# Altium PCB largeCollar_AA.PcbDoc
Units mil, origin at the board's own origin, x right, y up, seen from the top; angles counter-clockwise.
Board outline 2200 x 1299.21 mil, 4 copper layers (Top Layer, Ground, Power, Bottom Layer), stack 58.706 mil thick; 92 components, 50 nets, 292 pads, 105 vias.
Unrouted connection lines stored in the file: 132.
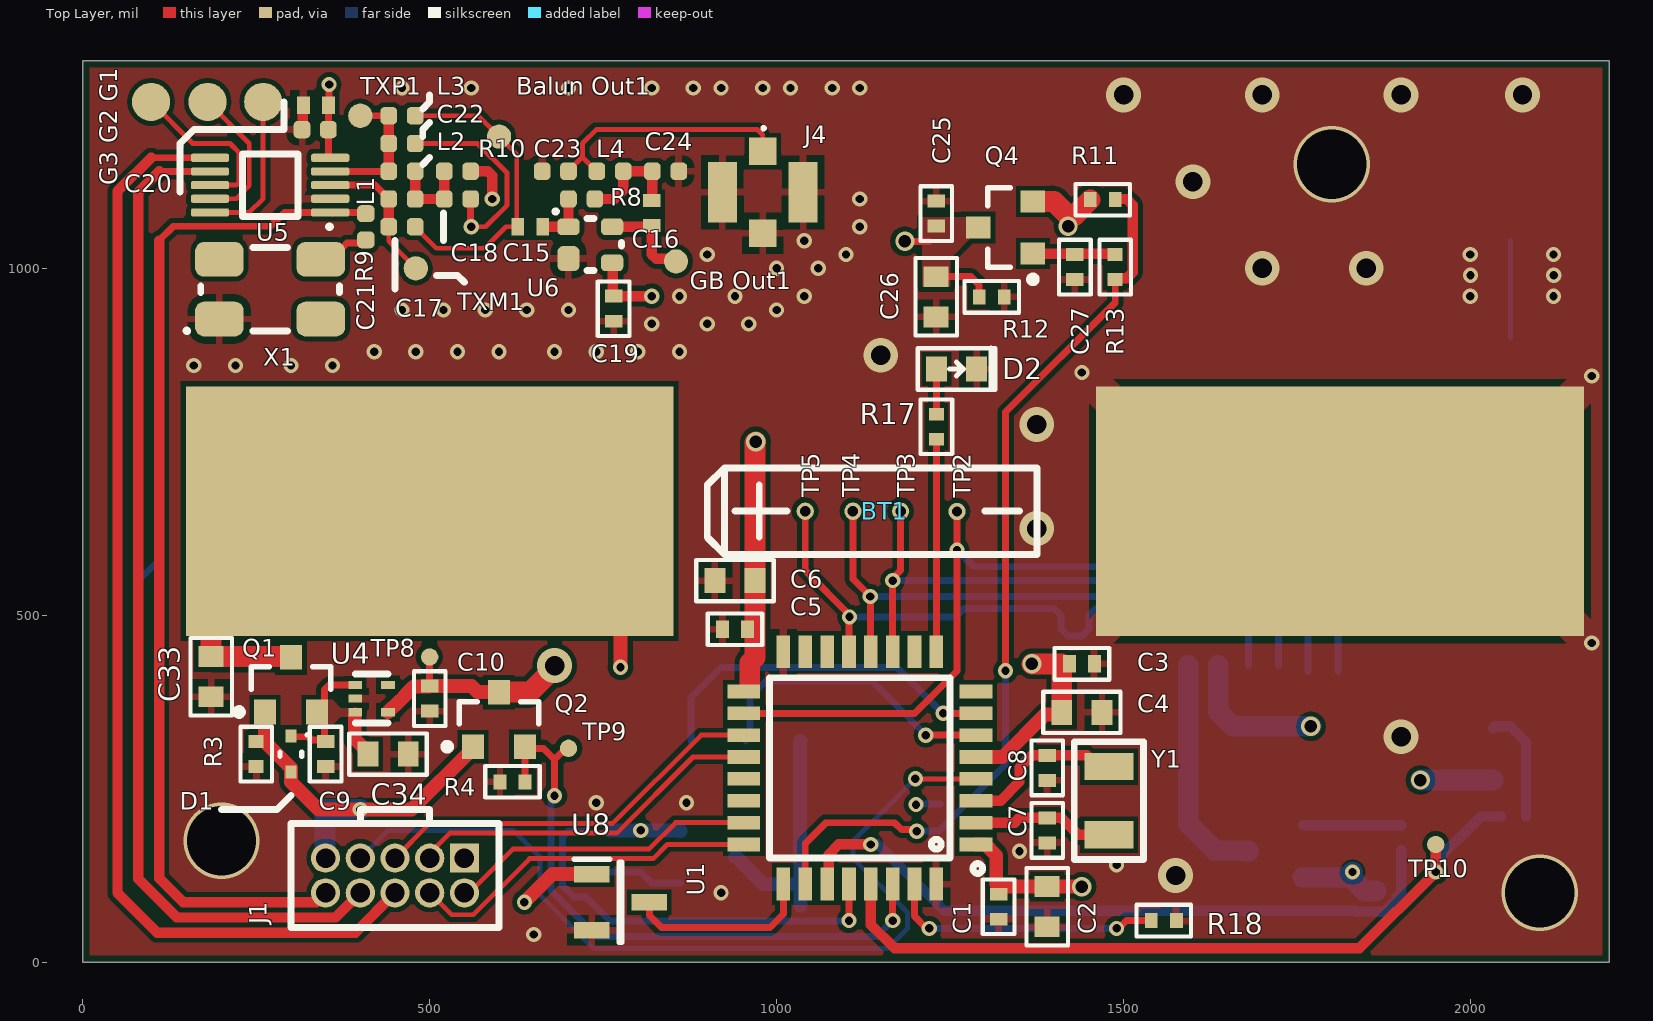
[diagram p0: Top Layer view]
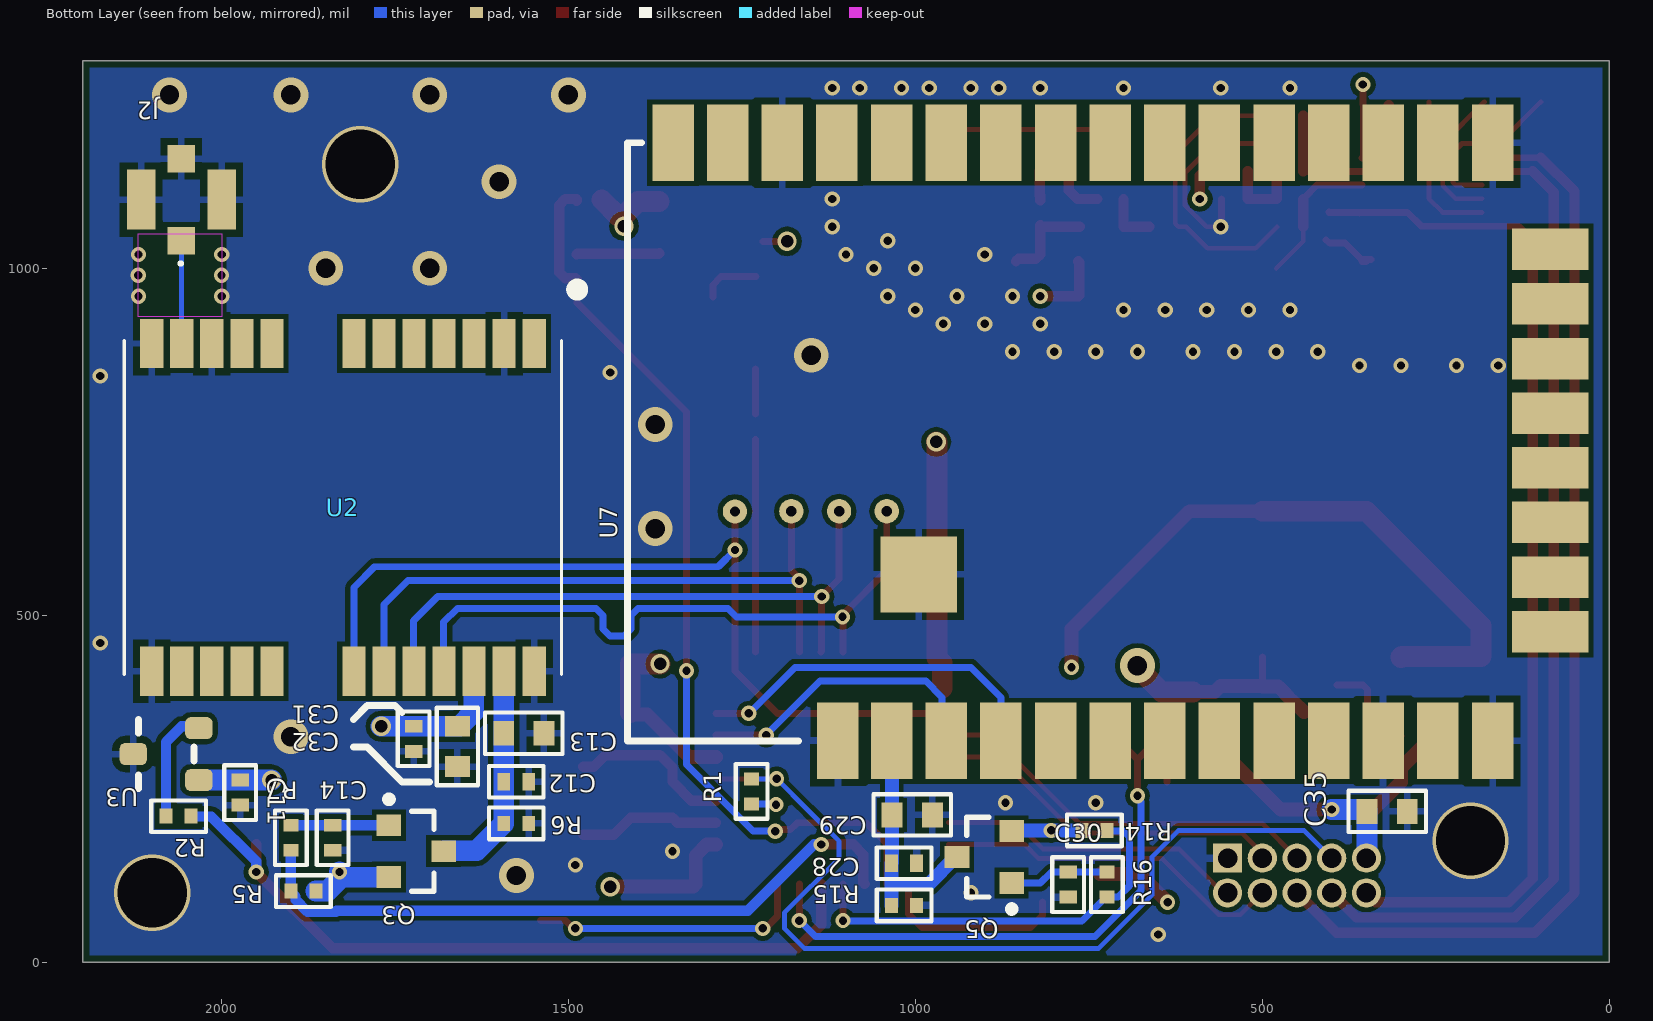
[diagram p1: Bottom Layer view, seen from below]
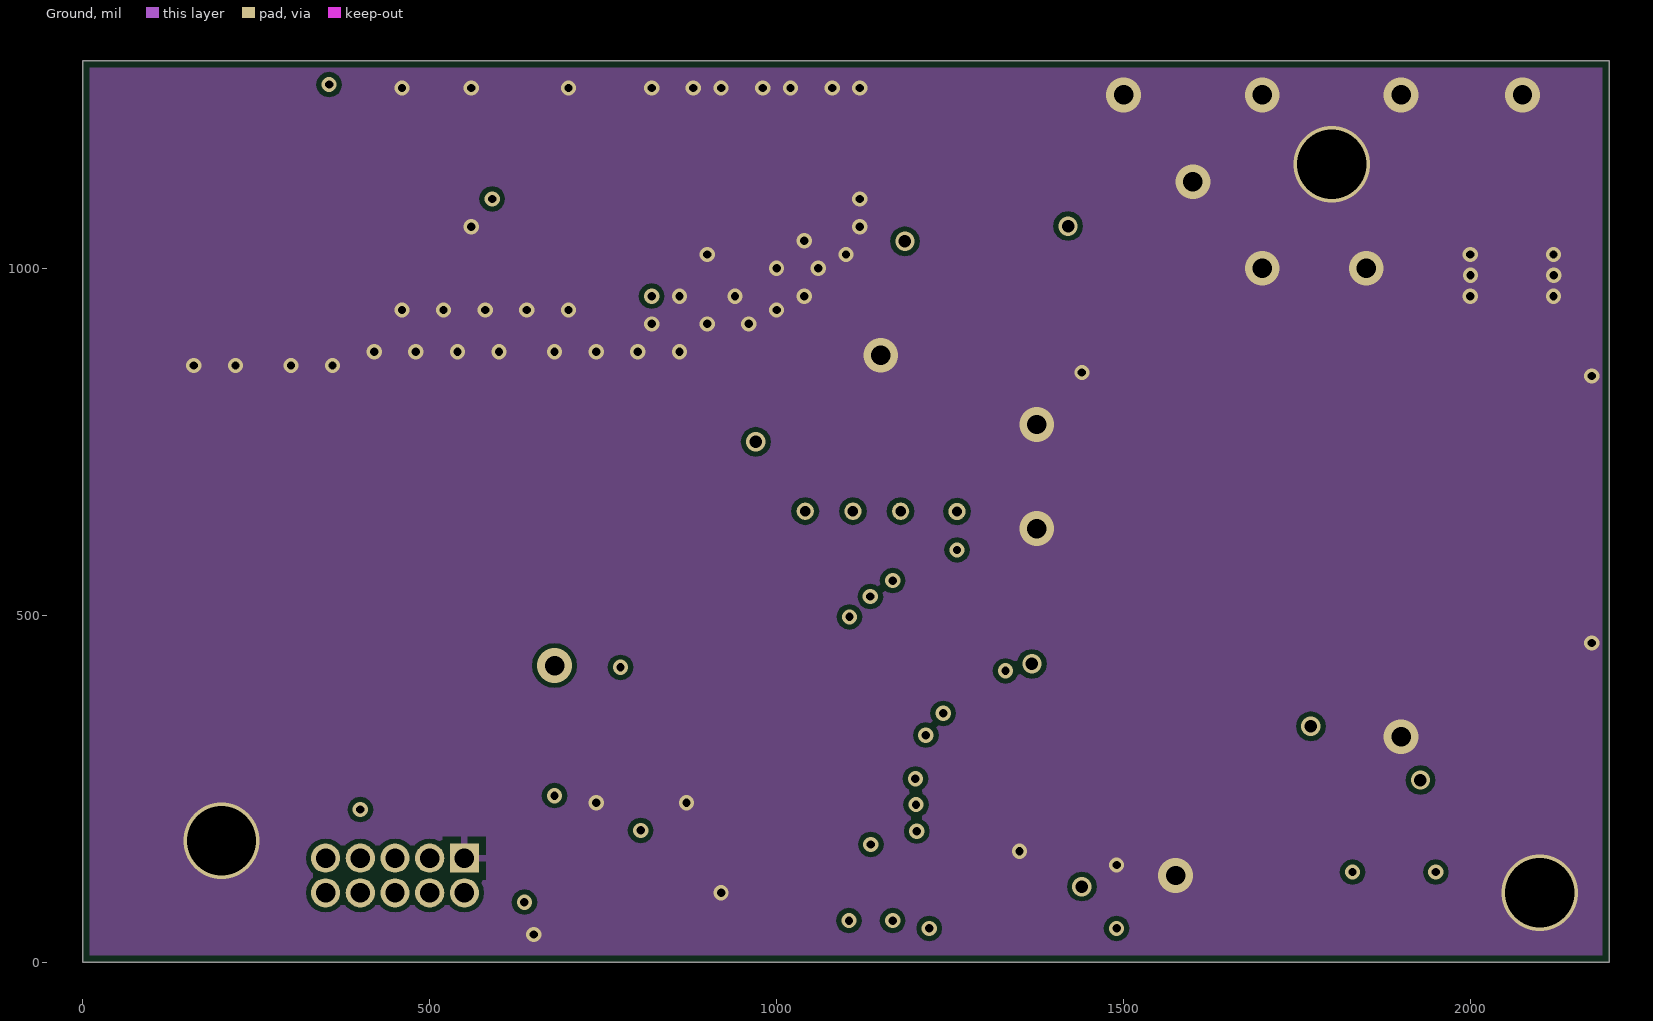
[diagram p2: Ground]
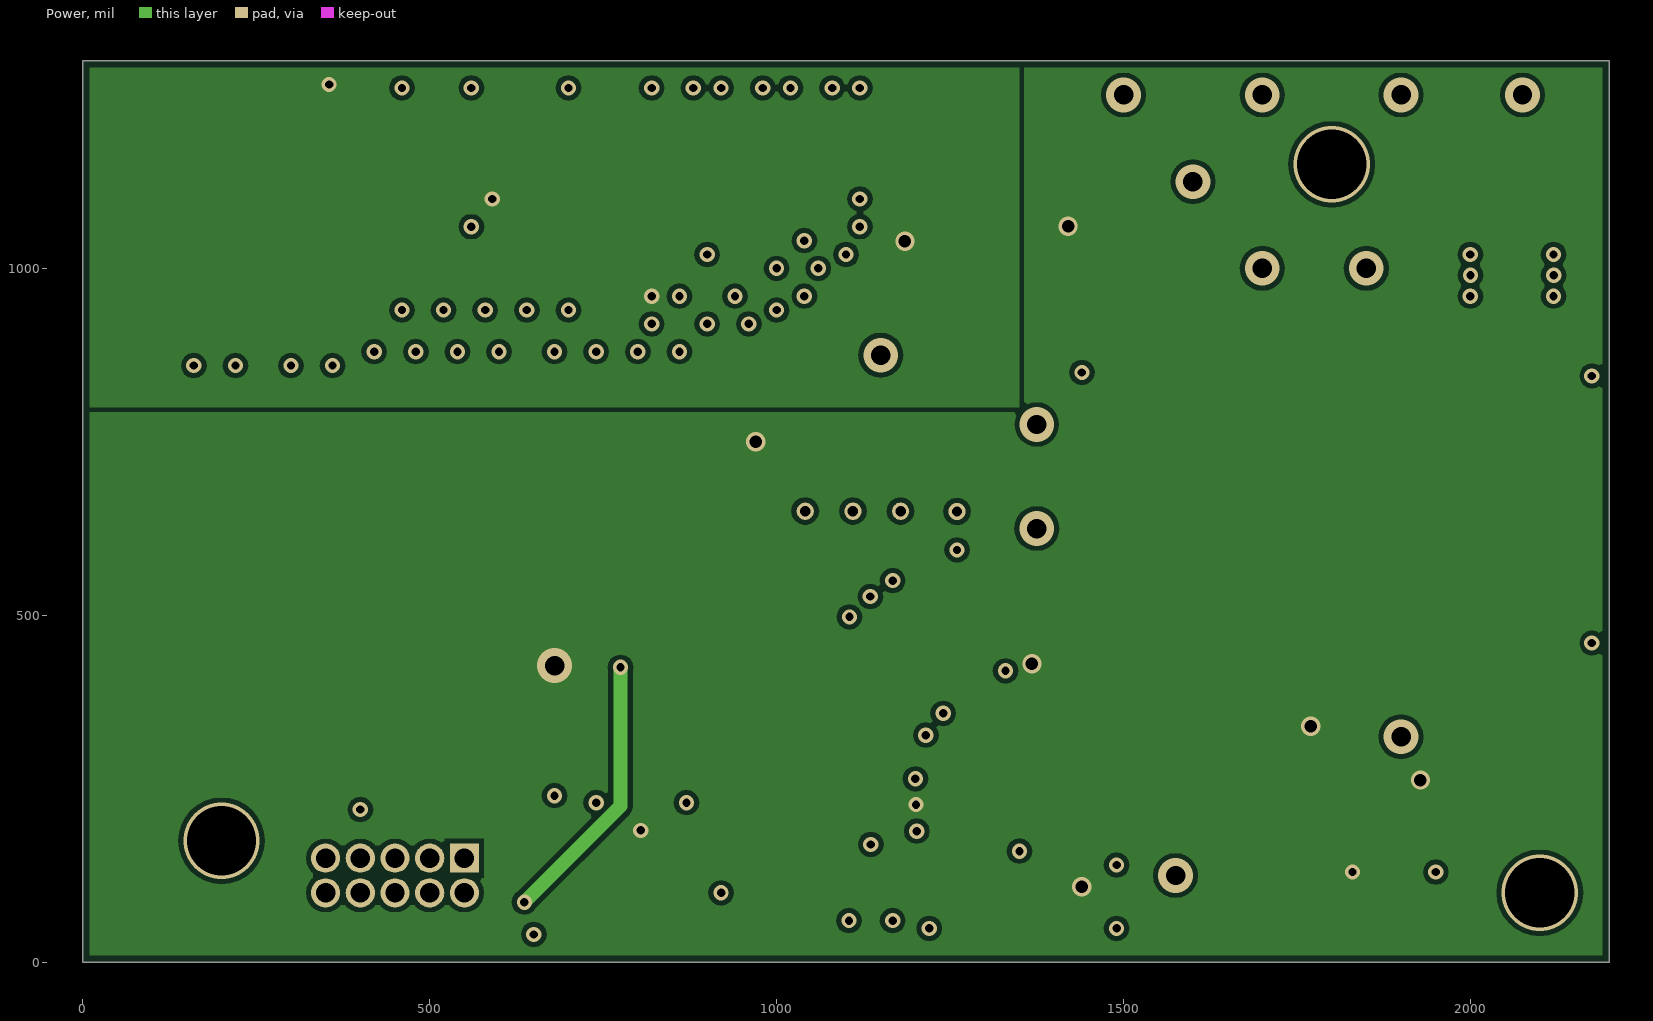
[diagram p3: Power]
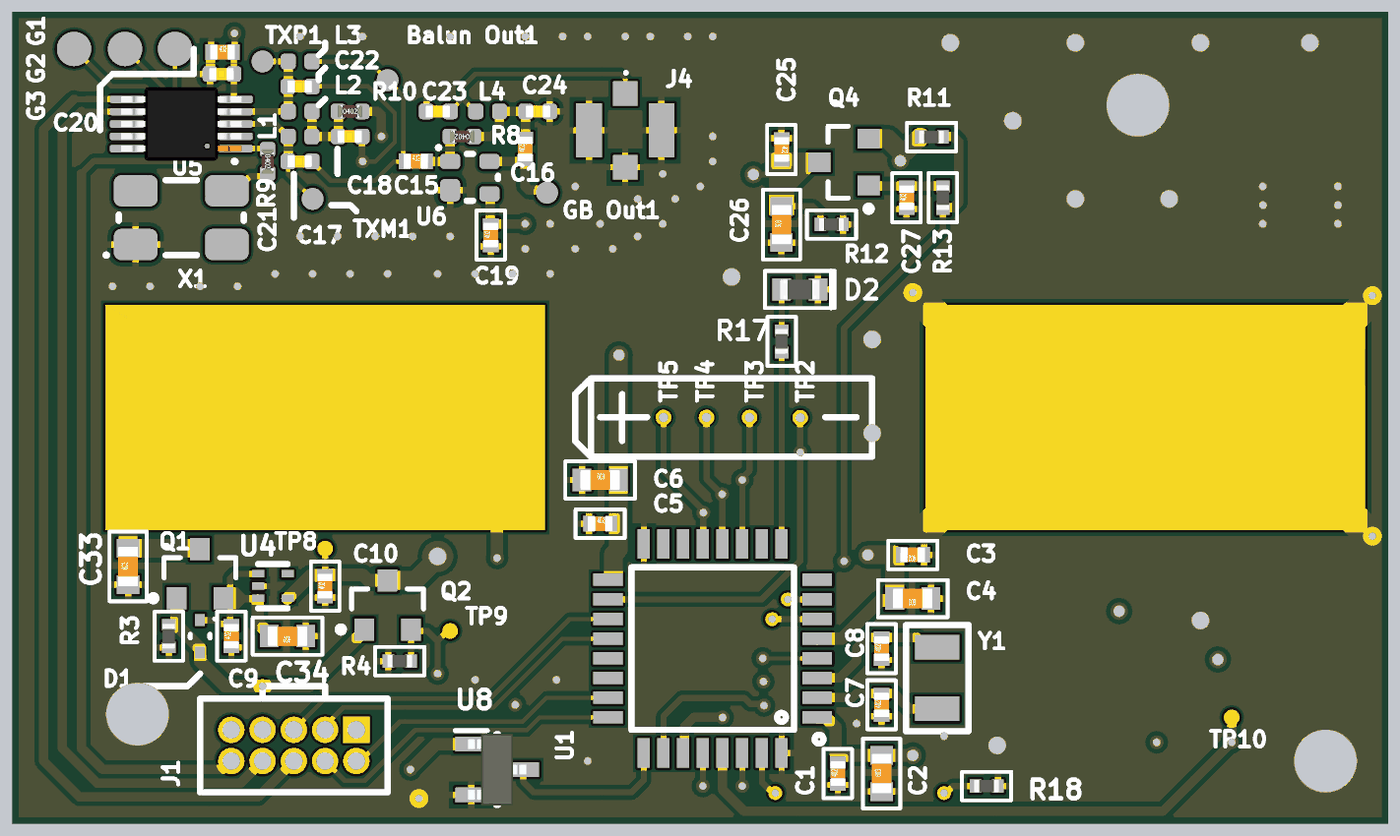
[diagram p4: 3D render of the assembled board from above, using the file's embedded part models]
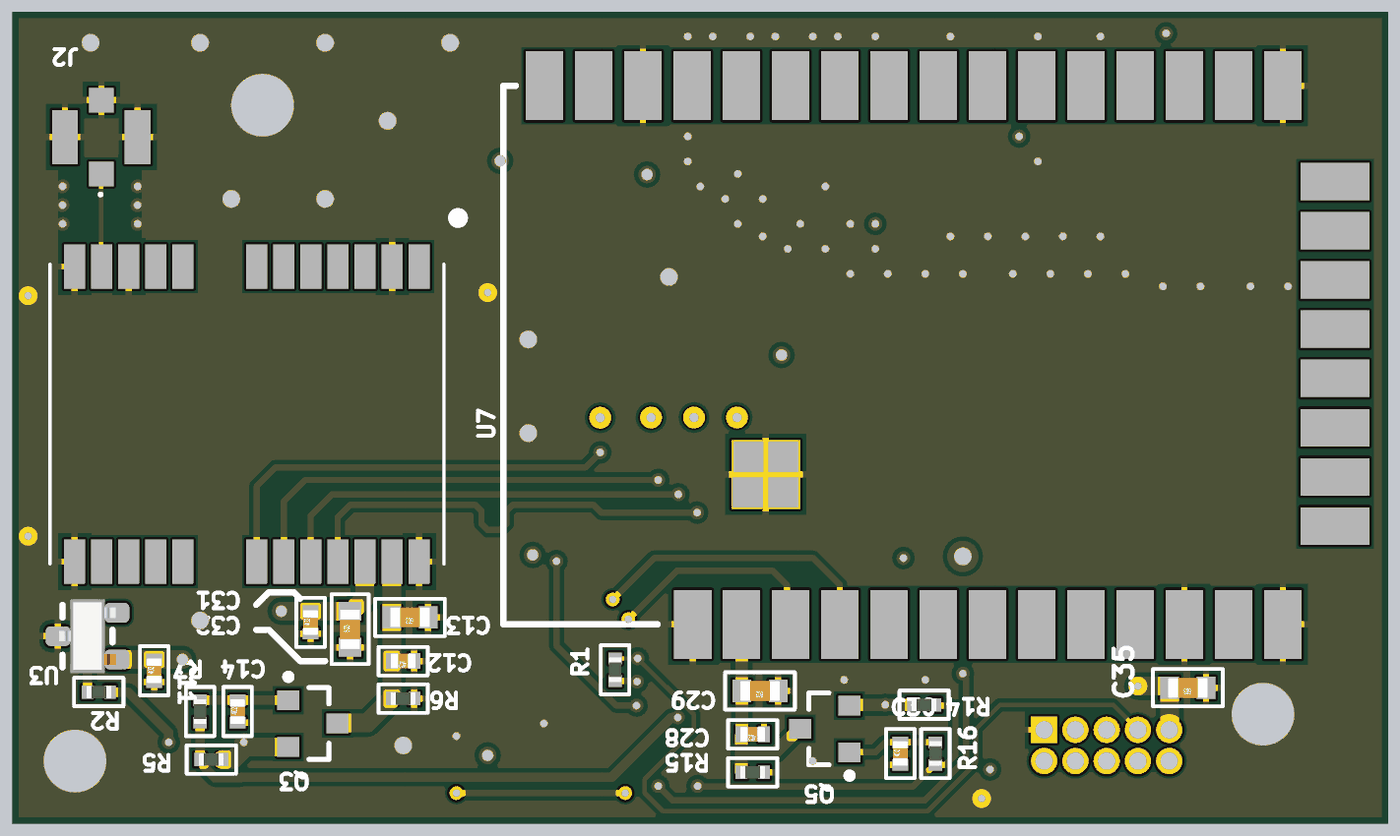
[diagram p5: 3D render of the assembled board from below, using the file's embedded part models]

## Layer stack, top to bottom
Top Solder: solder mask 0.4, Solder Resist, Dk 3.5
Top Layer: signal copper 1.4
Dielectric 2: prepreg 4.33, PP-006, Dk 4.29
Ground: signal copper 1.3778
Dielectric 1: dielectric 44.49, FR-4, Dk 3.96
Power: signal copper 1.3778
Dielectric 3: prepreg 4.33, PP-006, Dk 4.29
Bottom Layer: signal copper 1.4
Bottom Solder: solder mask 0.4, Solder Resist, Dk 3.5

## Board outline
0,0 2200,0 2200,1299.21 0,1299.21

## Design rules (kind name [scope] priority, off if disabled: settings)
BoardOutlineClearance [All] p1: gap=10 ignorepadtopadclearanceinfootprint=FALSE
Clearance [All] p1: gap=7 ignorepadtopadclearanceinfootprint=FALSE
ComponentClearance isBattery [InComponent('BT1')] p1: gap=0 collisioncheckmode=3 verticalgap=0 showdistances=FALSE
ComponentClearance isTestPoint [InComponent('TP*')] p2: gap=0 collisioncheckmode=3 verticalgap=0 showdistances=FALSE
ComponentClearance [All] p3: gap=10 collisioncheckmode=3 verticalgap=10 showdistances=FALSE
HoleSize [All] p1: absolutevalues=TRUE maxlimit=6000 minlimit=12 maxpercent=80.000 minpercent=20.000
MinimumSolderMaskSliver [All] p1: minsoldermaskwidth=0
PolygonConnect [HasFootprint('KEYSTONE_99')] p1: connectstyle=Relief reliefconductorwidth=50 reliefentries=4 polygonreliefangle="45 Angle" airgapwidth=10
PolygonConnect IsGround [InNet('GND')] p2: thpad.connectstyle=Relief thpad.reliefconductorwidth=10 thpad.reliefentries=4 thpad.polygonreliefangle="90 Angle" thpad.airgapwidth=10 smdpad.connectstyle=Relief smdpad.reliefconductorwidth=10 smdpad.reliefentries=4 smdpad.polygonreliefangle="90 Angle" smdpad.airgapwidth=10 via.connectstyle=Direct via.reliefconductorwidth=10 via.reliefentries=4 via.polygonreliefangle="90 Angle" via.airgapwidth=10
PolygonConnect IsntGround [All] p3: connectstyle=Direct reliefconductorwidth=10 reliefentries=4 polygonreliefangle="90 Angle" airgapwidth=10
RoutingVias [All] p1: holewidth=12 width=22 viastyle="Through Hole" minholewidth=12 minwidth=22 maxholewidth=25 maxwidth=50
SilkToSilkClearance [All] p1: silktosilkclearance=0
SilkToSolderMaskClearance [IsPad] p1: minsilkscreentomaskgap=0 clearancetoexposedcopper=TRUE
SolderMaskExpansion [All] p1: expansion=4
Width "50_OHM WIDTH" [InNetClass('50_OHM')] p1: maxlimit=7.07 minlimit=5.09 preferedwidth=7.07 toplayer_minwidth=7.07 midlayer1_maxwidth=5.09 midlayer1_prefwidth=5.09 midlayer2_maxwidth=5.09 midlayer2_prefwidth=5.09 bottomlayer_minwidth=7.07 impedanceprofiledriven=TRUE impedanceprofileid={2358161A-88EF-4679-99E9-6DA18A3A4E13} minimp=50.000000 maximp=50.000000 favimp=50.000000
Width Power [InNetClass('Power')] p2: maxlimit=30 minlimit=10 preferedwidth=20
Width "regular trace" [All] p3: maxlimit=15 minlimit=7 preferedwidth=10
25 further rules are at their usual default settings.

## Classes and differential pairs
net class POWER: 3V3 NetC9_2 V_BATT V_GPS V_XBEE VBUS
net class 50_OHM: "Balun Out" NetC23_1 NetJ2_1
component class U_XBeeModule: C28 C29 C30 Q5 R14 R15 R16 U7
component class "U_Si4010 Beacon Adjusted": "Balun Out1" C15 C16 C17 C18 C19 C20 C21 C22 C23 C24 C25 C26 C27 G1 G2 G3 "GB Out1" J4 L1 L2 L3 L4 Q4 R8 R9 R10 R11 R12 R13 TXM1 TXP1 U5 U6 X1
component class U_Power: BT1 C9 C10 C11 C33 C34 C35 D1 Q1 Q2 R2 R3 R4 TP8 TP9 TP10 U3 U4 U8
component class U_Microcontroller: C1 C2 C3 C4 C5 C6 C7 C8 D2 J1 R1 R17 R18 TP2 TP3 TP4 TP5 U1 Y1
component class U_GPSModule: C12 C13 C14 C31 C32 J2 Q3 R5 R6 R7 U2

## Components (designator, comment, footprint, x,y, rotation, side; value= is the part's Value field where it differs from the comment)
"Balun Out1" "Test Point" "Test Point-SM35"#1 620,1210 r90 top locked
BT1 "KEYSTONE_99" KEYSTONE_99 500,650 r0 top locked
C1 "C0402" 0402cap 1320,80 r90 top value=0.1uF
C2 "C0603" 0603CAP 1390,80 r90 top value=4.7uF
C3 "C0402" 0402cap 1440,430 r180 top value=0.1uF
C4 "C0603" 0603CAP 1440,360 r180 top value=4.7uF
C5 "C0402" 0402cap 940,480 r0 top value=0.1uF
C6 "C0603" 0603CAP 940,550 r0 top value=4.7uF
C7 "C0402" 0402cap 1390,190 r90 top value=4.3pF
C8 "C0402" 0402cap 1390,280 r90 top value=4.3pF
C9 "C0402" 0402cap 350,300 r90 top value=0.1uF
C10 "C0402" 0402cap 500,380 r90 top value=1uF
C11 "C0402" 0402cap 1973.23,244.55 r90 bottom value=0.1uF
C12 "C0402" 0402cap 1575.26,260 r0 bottom value=0.1uF
C13 "C0603" 0603CAP 1564.31,330 r0 bottom value=4.7uF
C14 "C0402" 0402cap 1840,179.35 r90 bottom value=0.022uF
C15 "C0402" 0402cap 645,1060 r0 top value=0.1uF
C16 "C0402" 0402cap 820,1080 r90 top value=0.1uF
C17 "Chip Capacitor" "Capacitor - 0402" 460,1060 r270 top locked value="10 pF"
C18 "Chip Capacitor" "Capacitor - 0402" 540,1100 r270 top locked value=np
C19 "C0402" 0402cap 765,941.95 r90 top value=0.1uF
C20 "Chip Capacitor" "Capacitor - 0402" 335,1200 r270 top locked value="100 pF"
C21 "C0402" 0402cap 335.95,1235 r0 top value=1uF
C22 "Chip Capacitor" "Capacitor - 0402" 460,1180 r270 top locked value="10 pF"
C23 "Chip Capacitor" "Capacitor - 0402" 681,1140 r270 top locked value="18 pF"
C24 "Chip Capacitor" "Capacitor - 0402" 840,1140 r90 top locked value="18 pF"
C25 "C0402" 0402cap 1230,1079 r270 top value=0.1uF
C26 "C0603" 0603CAP 1230,959 r90 top value=4.7uF
C27 "C0402" 0402cap 1430,1001.95 r90 top value=0.022uF
C28 "C0402" 0402cap 1016.2,142.69 r0 bottom value=0.1uF
C29 "C0603" 0603CAP 1004.5,212.3 r0 bottom value=4.7uF
C30 "C0402" 0402cap 780,111.95 r90 bottom value=0.022uF
C31 "C0402" 0402cap 1723.23,321.95 r90 bottom value=0.1uF
C32 "C0603" 0603CAP 1660,311 r90 bottom value=4.7uF
C33 "C0603" 0603CAP 185,411.57 r90 top value=4.7uF
C34 "C0603" 0603CAP 440,300 r180 top value=4.7uF
C35 "C0603" 0603CAP 320,217.3 r0 bottom value=4.7uF
D1 "RB521S30T1G" ONSC-SOD-523-2-502-01_V 300,300 r270 top
D2 "D0603" 0603DDE 1259.24,855 r0 top value=B
G1 "Test Point" "Test Point-SM55" 98.49,1240 r90 top locked
G2 "Test Point" "Test Point-SM55" 180,1240 r90 top locked
G3 "Test Point" "Test Point-SM55" 260,1240 r90 top locked
"GB Out1" "Test Point" "Test Point-SM35"#2 855,1010 r90 top
J1 "10 PIN" FTSH-105-01-F-D-K 550,150 r180 top
J2 "73412-0110" 73412-0110 2057.87,1099.06 r180 bottom
J4 "73412-0110" 73412-0110 980,1109.77 r180 top locked
L1 "0402" "Inductor - 0402" 460,1100 r90 top locked value="100 nH"
L2 "0402" "Inductor - 0402" 460,1140 r270 top locked value="390 nH"
L3 "0402" "Inductor - 0402" 460,1220 r270 top locked value="100 nH"
L4 "0402" "Inductor - 0402" 760,1140 r90 top locked value="91 nH"
Q1 "NTR2101PT1G" ONSC-SOT-23-3-318-08_V 300,400 r90 top
Q2 "2N7002ET1G" ONSC-SOT-23-3-318-08_V 600,350 r90 top
Q3 "NTR2101PT1G" ONSC-SOT-23-3-318-08_V 1719.37,160 r180 bottom
Q4 "NTR2101PT1G" ONSC-SOT-23-3-318-08_V 1330,1059 r180 top
Q5 "NTR2101PT1G" ONSC-SOT-23-3-318-08_V 900.63,151.49 r0 bottom
R1 "R0402" 0402RES 1236.1,246.2 r90 bottom value=47k
R2 "R0402" 0402RES 2061.95,210.49 r180 bottom value=220R
R3 "R0402" 0402RES 250,300 r90 top value=500k
R4 "R0402" 0402RES 619.35,260 r0 top value=500k
R5 "R0402" 0402RES 1881.95,102.52 r180 bottom value=1.0M
R6 "R0402" 0402RES 1575.26,200 r0 bottom value=1.0M
R7 "R0402" 0402RES 1900,179.35 r90 bottom value=220k
R8 "Chip Resistor" "Resistor - 0402" 719,1100 r90 top locked value=NP
R9 "Chip Resistor" "Resistor - 0402" 408,1060 r180 top value=0
R10 "Chip Resistor" "Resistor - 0402" 540,1140 r270 top locked value=0
R11 "R0402" 0402RES 1470,1099 r180 top value=1.0M
R12 "R0402" 0402RES 1310,959 r180 top value=1.0M
R13 "R0402" 0402RES 1488.05,1001.95 r90 top value=220k
R14 "R0402" 0402RES 741.95,190 r0 bottom value=1.0M
R15 "R0402" 0402RES 1016.2,81.98 r0 bottom value=1.0M
R16 "R0402" 0402RES 723.9,111.95 r270 bottom value=220k
R17 "R0402" 0402RES 1230.24,771.8 r270 top value=220R
R18 "R0402" 0402RES 1558.05,60 r180 top value=47k
TP2 "TESTPOINT" "TP R35 TH15"#1 1260,649.61 r90 top
TP3 "TESTPOINT" "TP R35 TH15"#1 1178.76,650 r90 top
TP4 "TESTPOINT" "TP R35 TH15"#2 1135.75,650 r90 top
TP5 "TESTPOINT" "TP R35 TH15"#1 1041.26,650 r90 top
TP8 "TESTPOINT" "TP R25" 500,440 r90 top
TP9 "TESTPOINT" "TP R25" 700,308.3 r90 top
TP10 "TESTPOINT" "TP R25" 1950,169.76 r270 top
TXM1 "Test Point" "Test Point-SM35"#2 480,1000 r90 top locked
TXP1 "Test Point" "Test Point-SM35"#2 400,1220 r90 top locked
U1 "STM32L011K4T6" LQFP32 1120,280 r90 top locked
U2 "RF RCVR GNSS/GPS 1.575GHZ 24LCC" NEO-M8N-0 1825,655.47 r90 bottom
U3 "DRV5032FBDBZT" SOT-23 2080,300 r90 bottom
U4 "IC REG LINEAR 3.3V 200MA ESV" TCR2EE33,LM(CT 392.7,399.69 r270 top
U5 "Si4010-GT" MSOP10 270,1120 r180 top locked value=-
U6 "Gain Block" BGA427 731.5,1034 r270 top locked
U7 "XB9X-DMUS-001" XBee/XBee-PRO 750,750 r90 bottom locked
U8 "STM809TWX6F" SOT103P237X112-3N 775.17,86.5 r0 top
X1 "Crystal" "ECS Crystal" 270,970 r0 top locked value="10 MHz"
Y1 "32.768kHz" "0.126\" L x 0.061\" W (2 PAD)" 1479,232.76 r270 top

## Footprints (in the part's own frame and the unit in brackets; to place one, negate y for a bottom-side part, rotate by r counter-clockwise, add the part's x,y. Pads: shape width x height; smd on the part's side, far side on the other; paste and mask are expansions set on the pad)
"0.126\" L x 0.061\" W (2 PAD)" [mm] "0.126\" x 0.061\" Crystal"
  rect 1x1.8 smd: 1(-1.25,0) 2(1.25,0)
  silkscreen extent -2.16,-1.27 2.16,1.27, body extent -1.78,-0.89 1.78,0.89, height 0.8
0402cap [mm] "Chip Capacitor; Body 1.0 x 0.5 mm (LxW typ)"
  rect 0.47x0.64 smd: 1(-0.458,0) 2(0.458,0)
  silkscreen extent -1,-0.58 1,0.58, body extent -1,-0.58 1,0.58, height 0.2
0402RES [mm] "Chip Resistor; Body 1.0 x 0.5 mm (LxW typ)"
  rect 0.47x0.549 smd: 1(-0.458,0) 2(0.458,0)
  silkscreen extent -1,-0.58 1,0.58, body extent -1,-0.58 1,0.58, height 0.27
0603CAP [mil] "Chip Capacitor; Body 1.6 x 0.8 mm (LxW typ)"
  rect 30x35.98 smd: 1(-29,0) 2(29,0)
  silkscreen extent -56,-30 56,30, body extent -56,-30 56,30, height 12
0603DDE [mil] "Chip Diode; Body 1.6 x 0.8 mm (LxW typ)"
  rect 30x35.98 smd: 1(-29,0) 2(29,0)
  silkscreen extent -56,-30 56,30, body extent -56,-30 56,30, height 15
73412-0110 [mm]
  rect 1x1 smd: 1(0,-1.5) 2(0,1.5)
  rect 1.05x2.2 smd: 3(-1.475,0) 4(1.475,0)
  silkscreen extent -0.05,-2.35 -0.01,-2.32
BGA427 [mil]
  rrect50% 24x32 smd: 1(-26,-31.5) 3(26,31.5) 4(-26,31.5)
  rrect50% 36x32 smd: 2(20,-31.5)
  silkscreen extent -49,-51 37,45, body extent -39,-41 39,41, height 35
"Capacitor - 0402" [mil]
  rrect50% 25x24 smd: 1(0,19) 2(0,-19)
  body extent -10,-20 10,19, height 19
"ECS Crystal" [mil]
  rrect50% 70x50 smd: 1(-73,-43) 2(73,-43) 3(73,43) 4(-73,43)
  silkscreen extent -121,-61 100,60, body extent -100,-60 100,60, height 33
FTSH-105-01-F-D-K [mil] "FTSH-105-01-F-D-K"
  rect 42x42 hole 28: 1(0,0)
  round 42 hole 28: 2(50,0) 3(100,0) 4(150,0) 5(200,0) 6(0,50) 7(50,50) 8(100,50) 9(150,50) 10(200,50)
  silkscreen extent -50,-50 250,100, body extent -50,-50 250,100, height 126
"Inductor - 0402" [mil]
  rrect50% 25x24 smd: 1(0,19) 2(0,-19)
  body extent -10,-20 10,20, height 15
KEYSTONE_99 [mil]
  rect 703x360 smd paste-900: 1(0,0) 2(1312,0)
  silkscreen extent 400,-62 875,62
LQFP32 [mm] "STM LQFP32"
  rect 0.5x1.2 smd: 1(-2.8,-4.25) 2(-2,-4.25) 3(-1.2,-4.25) 4(-0.4,-4.25) 5(0.4,-4.25) 6(1.2,-4.25) 7(2,-4.25) 8(2.8,-4.25) 17(2.8,4.25) 18(2,4.25) 19(1.2,4.25) 20(0.4,4.25) 21(-0.4,4.25) 22(-1.2,4.25) 23(-2,4.25) 24(-2.8,4.25)
  rect 1.2x0.5 smd: 9(4.25,-2.8) 10(4.25,-2) 11(4.25,-1.2) 12(4.25,-0.4) 13(4.25,0.4) 14(4.25,1.2) 15(4.25,2) 16(4.25,2.8) 25(-4.25,2.8) 26(-4.25,2) 27(-4.25,1.2) 28(-4.25,0.4) 29(-4.25,-0.4) 30(-4.25,-1.2) 31(-4.25,-2) 32(-4.25,-2.8)
  silkscreen extent -3.86,-4.5 3.3,3.3, body extent -3.56,-3.56 3.56,3.56, height 1.6
MSOP10 [mm]
  rrect50% 1.4x0.3 smd: 1(-2.2,1) 2(-2.2,0.5) 3(-2.2,0) 4(-2.2,-0.5) 5(-2.2,-1) 6(2.2,-1) 7(2.2,-0.5) 8(2.2,0) 9(2.2,0.5) 10(2.2,1)
  silkscreen extent -2.18,-1.14 1.02,1.53, body extent -2.45,-1.5 2.45,1.5, height 1.15
NEO-M8N-0 [mm]
  rect 1.8x0.85 smd: 1(6,-7) 2(6,-5.9) 3(6,-4.8) 4(6,-3.7) 5(6,-2.6) 6(6,-1.5) 7(6,-0.4) 8(6,2.6) 9(6,3.7) 10(6,4.8) 11(6,5.9) 12(6,7) 13(-6,7) 14(-6,5.9) 15(-6,4.8) 16(-6,3.7) 17(-6,2.6) 18(-6,-0.4) 19(-6,-1.5) 20(-6,-2.6) 21(-6,-3.7) 22(-6,-4.8) 23(-6,-5.9) 24(-6,-7)
  silkscreen extent -6.1,-8.77 8.17,8, body extent -6.1,-7.62 6.1,8.13, height 0.51
ONSC-SOD-523-2-502-01_V [mm] "SOD, 2-Leads, Body 1.2x0.8mm"
  rect 0.48x0.4 smd: 1(-0.66,0) 2(0.66,0)
  silkscreen extent -0.75,-0.4 0.07,0.65, body extent -0.6,-0.4 0.6,0.4, height 0.7
ONSC-SOT-23-3-318-08_V [mm] "SOT23, 3-Leads, Body 2.92x1.3mm, Pitch 0.95mm"
  rect 0.9x0.8 smd: 1(-1,0.95) 2(-1,-0.95) 3(1,0)
  silkscreen extent -1.12,-1.46 0.65,2.02, body extent -0.65,-1.46 0.65,1.46, height 1.11
"Resistor - 0402" [mil]
  rrect50% 25x24 smd: 1(0,19) 2(0,-19)
  body extent -10,-20 10,20, height 14
SOT103P237X112-3N [mm]
  rect 1.3x0.6 smd: 1(-1.05,1.03) 2(-1.05,-1.03) 3(1.05,0)
  silkscreen extent -1.7,-1.46 0.05,1.58, body extent -1.18,-1.46 1.18,1.46, height 1.12
SOT-23 [mm]
  rrect50% 0.8x1 smd: 1(-0.95,-1.2) 2(0.95,-1.2) 3(0,1.2)
  silkscreen extent -1.27,-1.02 1.27,1.02, body extent -1.5,-1.15 1.5,1.15, height 1.1
TCR2EE33,LM(CT [mm] "SOT-553 / TCR2EE33,LM(CT"
  rect 0.3x0.5 smd: 1(0,0) 2(0.5,0) 3(1,0) 4(1,1.2) 5(0,1.2)
  silkscreen extent -0.4,0 1.4,1.2, body extent -0.3,0 1.3,1.2, height 0.55
"Test Point-SM35"#1 [mil]
  round 35 smd: 1(-20,20)
"Test Point-SM35"#2 [mil]
  round 35 smd: 1(0,0)
"Test Point-SM55" [mil]
  round 55 smd: 1(0,0)
"TP R25" [mil] "Testpoint, Round, 25 mil Surface Pad"
  round 25 smd paste-25: 1(0,0)
  body extent -16,-16 16,16, height 0
"TP R35 TH15"#1 [mil] "Testpoint, Round, 35 mil pad, 15 mil TH"
  round 25 / inner round 25 / far side round 35 hole 15 mask+3: 1(0,0)
  body extent -18,-17 17,17, height 0
"TP R35 TH15"#2 [mil] "Testpoint, Round, 35 mil pad, 15 mil TH"
  round 25 / inner round 25 / far side round 35 hole 15 mask+3: 1(0,25.75)
  body extent -18,-17 17,17, height 0
XBee/XBee-PRO [mm]
  rect 2.8x1.52 smd: 1(-10.95,9.19) 2(-10.95,7.22) 3(-10.95,5.22) 4(-10.95,3.22) 5(-10.95,1.22) 6(-10.95,-0.78) 7(-10.95,-2.78) 8(-10.95,-4.78) 9(-10.95,-6.78) 10(-10.95,-8.78) 11(-10.95,-10.78) 12(-10.95,-12.78) 13(-10.95,-14.78) 22(10.95,-14.78) 23(10.95,-12.78) 24(10.95,-10.78) 25(10.95,-8.78) 26(10.95,-6.78) 27(10.95,-4.78) 28(10.95,-2.78) 29(10.95,-0.78) 30(10.95,1.22) 31(10.95,3.22) 32(10.95,5.22) 33(10.95,7.22) 34(10.95,9.22) 35(10.95,11.22) 36(10.95,13.22) 37(10.95,15.22)
  rect 1.52x2.8 smd: 14(-6.95,-16.89) 15(-4.95,-16.89) 16(-2.95,-16.89) 17(-0.95,-16.89) 18(1.05,-16.89) 19(3.05,-16.89) 20(5.05,-16.89) 21(7.05,-16.89)
  rect 2.79x2.79 smd paste-100: 38(-4.855,6.225)
  silkscreen extent -10.95,10.62 10.95,16.89, body extent -10.92,-17.3 10.92,16.88, height 1.5

## Part data
BT1: Manufacturer 1="Keystone Electronics", Manufacturer Part Number 1=99, Supplier Part Number 1=36-99-ND, Supplier 1=Digikey
C1 C3 C5 C9 C11 C15 C16 C19: "0402 Ceramic Chip Capacitor - Standard", Manufacturer 1=Samsung, Manufacturer Part Number 1=CL05B104KO5NNNC, Supplier Part Number 1=1276-1001-1-ND, Supplier 1=Digi-Key
C2 C4 C6 C13 C26 C29 C32 C33 C34 C35: "0603 Ceramic Chip Capacitor - Standard"
C7 C8 C10 C12 C21 C25 C28 C31: "0402 Ceramic Chip Capacitor - Standard"
C14 C27 C30: "0402 Ceramic Chip Capacitor - Standard", Manufacturer 1="Taiyo Yuden", Manufacturer Part Number 1=EMK105B7223KV-F, Supplier Part Number 1=587-1224-1-ND, Supplier 1=Digi-Key
C17: Manufacturer 1=Murata, Manufacturer Part Number 1=GCM1555C1H100FA16D, Price=0.14
C20: Manufacturer 1="Murata Electronics North America", Manufacturer Part Number 1=GRM1555C1H101JA01J, Supplier Part Number 1=490-7754-1-ND, Price=0.1, Supplier 1=Digi-Key
C23 C24: Manufacturer 1=Kemet, Manufacturer Part Number 1=CBR04C180F5GAC, Price=0.32
D1: library part CMP-1051-00018-1, "Schottky Barrier Diode, 2-Pin SOD-523, Pb-Free, Tape and Reel", Manufacturer="On Semiconductor", ComponentLink1Description="Manufacturer URL", ComponentLink1URL=http://www.onsemi.com/, ComponentLink2Description=Datasheet, ComponentLink2URL=http://www.onsemi.cn/pub_link/Collateral/RB521S30T1-D.PDF, ComponentLink3Description="Package Specification", ComponentLink3URL=http://www.onsemi.com/pub_link/Collateral/502-01.PDF, Configuration=Single, DatasheetVersion="Rev. 8", IFSM Max (A)=1, Mounting Technology="Surface Mount", PackageDescription="2-Pin SOD, Body 1.2 x 0.8 mm", PackageReference=SOD-523-2-502-01, PackageVersion="Rev. E, 09/2010", Packing="Tape and Reel", PartNumber=RB521S30T1G, RoHS=TRUE
D2: "0603 SMD LED"
J1: library part FTSH-105-01-F-D-K, "10 Pin Programming Header", Manufacturer 1="Samtec Inc.", Supplier Part Number 1=SAM8909-ND, Manufacturer Part Number 1=FTSH-105-01-F-D-K, Supplier 1=Digikey
J2 J4: "50 Ohms, MCRF, PCB Vertical Jack Receptacle, SMT, 1.25mm Mounted Height", Manufacturer_Name=Molex, Mouser Part Number=538-73412-0110, RS Part Number=1676350, Allied_Number=70357960, Allied Price/Stock=https://www.alliedelec.com/molex-incorporated-73412-0110/70357960/, Datasheet Link=http://www.molex.com/pdm_docs/sd/734120110_sd.pdf, Manufacturer_Part_Number=73412-0110, Mouser Price/Stock=https://www.mouser.com/Search/Refine.aspx?Keyword=538-73412-0110, RS Price/Stock=http://uk.rs-online.com/web/p/products/1676350
L1 L3: library part "Inductor - 0402", "0402 Inductor", Manufacturer 1=TDK, Manufacturer Part Number 1=MLG1005SR10JT000, Price=0.1
L2: library part "Inductor - 0402", "0402 Inductor", Manufacturer 1=TDK, Manufacturer Part Number 1=MHQ1005PR39HT000, Price=0.28, Vendor=Digikey, Vendor PN=445-175487-1-ND
L4: library part "Inductor - 0402", "0402 Inductor", Manufacturer 1=TDK, Manufacturer Part Number 1=MLG1005S91NJT000, Price=0.1
Q1 Q3 Q4 Q5: "Small Signal MOSFET, -8 V, -3.7 A, Single P-Channel, 3-Pin SOT-23, Pb-Free, Tape and Reel", Manufacturer 1="On Semiconductor", Package Type=SOT-23-3, Channel Polarity="P Channel", Ciss Typ (pF)=1173, ComponentLink1Description="Manufacturer URL", ComponentLink1URL=http://www.onsemi.com/, ComponentLink2Description=Datasheet, ComponentLink2URL=http://www.onsemi.cn/pub_link/Collateral/NTR2101P-D.PDF, ComponentLink3Description="Package Specification", ComponentLink3URL=http://www.onsemi.cn/pub_link/Collateral/318-08.PDF, Configuration=Single, Coss Typ (pF)=289, Crss Typ (pF)=218, DatasheetVersion="Rev. 6", ID Max (A)=3.7, Manufacturer Part Number 1=NTR2101PT1G, Mounting Technology="Surface Mount", PackageDescription="3-Pin Small Outline Transistor, Body 2.92 x 1.3 mm, Pitch 0.95 mm", PackageReference=SOT-23-3-318-08, PackageVersion="Rev. AP, 11/2009", Packing="Tape and Reel", PD Max (W)=0.96, RoHS=Pb-Free, V(BR)DSS Min (V)=8, VGS(th) Max (V)=1, VGS Max (V)=8
Q2: "Small Signal MOSFET, 60 V, 310 mA, Single, N-Channel, 3-Pin SOT-23, Pb-Free, Tape and Reel", Manufacturer="On Semiconductor", Package Type=SOT-23-3, Supplier Part Number 1=2N7002ET1GOSTR-ND, Channel Polarity="N Channel", Ciss Typ (pF)=26.7, ComponentLink1Description="Manufacturer URL", ComponentLink1URL=http://www.onsemi.com/, ComponentLink2Description=Datasheet, ComponentLink2URL=http://www.onsemi.com/pub_link/Collateral/2N7002E-D.PDF, ComponentLink3Description="Package Specification", ComponentLink3URL=http://www.onsemi.cn/pub_link/Collateral/318-08.PDF, Configuration=Single, Coss Typ (pF)=4.6, Crss Typ (pF)=2.9, DatasheetVersion="Rev. 3", ID Max (A)=0.31, Mounting Technology="Surface Mount", PackageDescription="3-Pin Small Outline Transistor, Body 2.92 x 1.3 mm, Pitch 0.95 mm", PackageReference=SOT-23-3-318-08, PackageVersion="Rev. AP, 11/2009", Packing="Tape and Reel", PartNumber=2N7002ET1G, RoHS=Pb-Free, Supplier 1=Digi-Key, Supplier 2=Digi-Key, Supplier 3=Digi-Key, Supplier 4=Farnell, Supplier 5=Farnell, Supplier 6=Newark, Supplier 7=Newark, Supplier 8=Mouser, Supplier Part Number 2=2N7002ET1GOSCT-ND, Supplier Part Number 3=2N7002ET1GOSDKR-ND, Supplier Part Number 4=2317895, Supplier Part Number 5=2317616, Supplier Part Number 6=09R9861, Supplier Part Number 7=50M2216, Supplier Part Number 8=863-2N7002ET1G, V(BR)DSS Min (V)=60, VGS(th) Max (V)=2.5, VGS Max (V)=20
R1 R2 R3 R4 R5 R6 R7 R11 R12 R13 R14 R15 R16 R17 R18: "0402 Chip Resistor - Standard"
R9 R10: Manufacturer 1=Yageo, Manufacturer Part Number 1=RC0402JR-070RL, Price=0.1
TP2 TP3 TP4 TP5: library part TP35TH10, "0.035\"/0.015\" Thru Hole Test Point", Part Name=Testpoint, Part Number=1617
TP8 TP9 TP10: library part TP25, "0.025\" Round Test Point", Part Name=Testpoint, Part Number=1613
U1: "STMicro ARM M0+ Microcontroller", Manufacturer_Name=STMicroelectronics, Manufacturer_Part_Number=STM32L011x3/4, Supplier_1=Digikey
U2: library part NEO-M8N-0, "Concurrent GNSS LCC module, TCXO, Flash, SAW, LNA", Manufacturer 1="U-Blox America Inc.", Supplier Part Number 1=672-1008-1-ND, Manufacturer Part Number 1=NEO-M8N-0, Supplier 1=Digi-Key
U3: "Hall Effect Sensor"
U4: library part TCR2EE33,LM(CT, "Linear Voltage Regulator IC Positive Fixed 1 Output  200mA ESV", Manufacturer 1="Toshiba Semiconductor and Storage", Supplier Part Number 1=TCR2EE33LM(CTCT-ND, ComponentLink1Description=Datasheet, ComponentLink1URL=https://toshiba.semicon-storage.com/info/docget.jsp?did=13794&prodName=TCR2EF45, Manufacturer Part Number 1=TCR2EE33,LM(CT, Supplier 1=Digikey
U5: "Transmitter/MCU", Manufacturer="Silion Labs", Manufacturer PN=Si4010-C2-GT, Price=3.75, Vendor=Digi-Key, Vendor PN=336-4342-1-ND
U6: library part BGA427, Manufacturer=Infineon, Manufacturer PN=BGA427H6327XTSA1, Price=0.84
U8: "IC MPU RESET CIRC 3.08V SOT23", Manufacturer 1=STMicroelectronics, Supplier Part Number 1=497-3339-1-ND, ComponentLink1Description=Datasheet, ComponentLink1URL=https://www.st.com/content/ccc/resource/technical/document/datasheet/cd/e2/ab/27/7d/5d/44/41/CD00003591.pdf/files/CD00003591.pdf/jcr:content/translations/en.CD00003591.pdf, Manufacturer Part Number 1=STM809TWX6F, Supplier 1=Digi-Key
X1: library part "ECS 53B Crystal", Manufacturer=ECS, Manufacturer PN=ECS-100-10-30B-CKL-TR, Price=0.69
Y1: library part NX3215SA-32.768K-STD-MUA-8, "NDK RTC 12.5pF Crystal SMD", Manufacturer 1=NDK, Supplier Part Number 1=644-1156-1-ND, Manufacturer Part Number 1=NX3215SA-32.768K-STD-MUA-8, Supplier 1=Digikey
C22: Price=0.14

## Via types
v1: diameter 22, hole 12, Top Layer to Bottom Layer, tented both sides, 73 vias
v2: diameter 50, hole 28, Top Layer to Bottom Layer, tented both sides, 13 vias
v3: diameter 22, hole 12, Top Layer to Bottom Layer, 9 vias
v4: diameter 28, hole 18, Top Layer to Bottom Layer, tented both sides, 7 vias
v5: diameter 110, hole 100, Top Layer to Bottom Layer, tented both sides, 3 vias

## Nets (pads, with @x,y where several pads share a name; then routed paths per layer and width w, separated by ;. In a path a pad name is that pad's centre, name@x,y a point inside that pad or via, vN(x,y) a via of type N, cw(c..) or ccw(c..) an arc to the next point about the centre after c; other vN are vias at no path point)
3V3: C1.2 C2.2 C3.2 C4.2 C5.2 C6.2 C10.2 C11.2 C31.2 C32.2 Q2.3 Q3.2 Q4.2 Q5.2 R1.1 R5.2 R11.2 R14.2 TP8.1 U1.1 U1.5 U1.17 U2.22 U3.1 U4.4 | length 1811.3
  Top Layer w10: C10.2 TP8.1
  Top Layer w20: U4.4 456.41,376.78 456.83,376.78 466.79,386.74 466.79,387.16 476.94,397.3 499.25,397.3 C10.2 560.1,398.05 568.78,389.37 Q2.3 ; v2@680,424.37 v2(680,427.56) ; U1.1 1300.79,169.76 1316.55,154 1316.55,112.45 1320,109 C2.2 v4(1440,109) ; U1.5 1287.48,295.91 1325.91,295.91 1387.01,357.01 1411,357.01 C4.2
  Top Layer w30: Q2.3 645,389.37 v2@680,424.37 ; U1.17@961.3,395.39 961.3,431.3 969,439 C6.2 969,749 v4(970,750) ; v4(1368.05,430) 1411,430 C4.2 ; Q4.2 1400,1096.4 1420,1076.4 1429.35,1076.4 R11.2
  Bottom Layer w10: v1(1200.97,227.18) 1201.95,228.15 R1.1
  Bottom Layer w20: R14.2 v1(804.09,190) 804.47,189.62 860.53,189.62 Q5.2
  Bottom Layer w30: U2.22@1636.61,427.56 1636.61,360.39 1657.01,340 C32.2 C31.2 v4(1770,340) ; Q3.2 1822.6,122.6 v1(1830,130) ; v1@1830,120 1847.48,102.52 R5.2 ; v4(1927.95,262.6) C11.2 U3.1
  other v4: 1420,1060.95
"Balun Out": "Balun Out1.1" C15.1 C17.1 L3.1 | length 443.9
  Top Layer w7.07: C17.1 479,1059.5 509.5,1029 579,1029 610,1060 621,1060 625.54,1064.54 625.54,1164.46 600,1190 570,1220 L3.1
"Gain Block In": C15.2 R8.1 U6.1 | length 77
  Top Layer w15: C15.2 U6.1 R8.1
"Gain Block Out": "GB Out1.1" C16.1 U6.4 | length 138.1
  Top Layer w15: U6.4 C16.1@820,1060 ; C16.1 820,1053.9 820,1020 826.17,1013.83 851.17,1013.83 855,1010
GND: BT1.2 C1.1 C2.1 C3.1 C4.1 C5.1 C6.1 C7.1 C8.1 C9.1 C10.1 C11.1 C12.1 C13.1 C14.1 C18.1 C19.1 C20.2 C21.1 C22.1 C23.2 C24.2 C25.1 C26.1 C27.1 C28.1 C29.1 C30.1 C31.1 C32.1 C33.1 C34.1 C35.1 D2.2 J1.1 J2.2 J2.3 J2.4 J4.2 J4.3 J4.4 R3.1 R4.1 R6.1 R12.1 R15.1 R18.1 U1.16 U1.32 U2.2 U2.10 U2.12 U2.13 U2.24 U3.3 U4.2 U5.2 U6.2 U7.1 U7.11 U7.13 U7.22 U7.35 U7.38 U8.2 X1.1 | length 327.1
  Top Layer w7: C22.1 568.96,1180 611.5,1137.46 611.5,1091.09 580.41,1060 v1@570,1060
  Top Layer w10: C18.1 559,1061 v1(560,1060)
  Top Layer w15: C20.2 316.95,1200.95 316.95,1234.05 C21.1
  other v1: 920,100 1490,140 1350,160 740,230 870,230 160,860 220,860 300,860 360,860 420,880 480,880 540,880 600,880 680,880 740,880 800,880 860,880 820,920 900,920 960,920 460,940 520,940 580,940 640,940 700,940 1000,940 860,960 940,960 1040,960 1999.8,960 2119.8,960 2000,990 2120,990 1000,1000 1060,1000 900,1020 1100,1020 1999.8,1020 2119.8,1020 1040,1040 1120,1060 1120,1100 460,1260 560,1260 700,1260 820,1260 880,1260 920,1260 980,1260 1020,1260 1080,1260 1120,1260
  other v2: 1575,125 1900,325 1375,625 1375,775 1150,875 1700,1000 1850,1000 1600,1125 1500,1250 1700,1250 1900,1250 2075,1250
  other v3: 650,40 2175,460 2175,845 1440,850
  other v5: 2100,100 200,175 1800,1150
GP0: J1.10 R9.2 U5.1 | length 1490.7
  Top Layer w10: 110,1040 130.74,1060.74 270.74,1060.74 290.63,1080.63 U5.1 U5.1@359.37,1080.63 ; U5.1@360,1080 359.69,1080.32 U5.1@359.37,1080.63 ; R9.2@404,1081 403.63,1080.63 U5.1@359.37,1080.63
  Top Layer w15: 110,1040 110,121.11 144.61,86.5 336.5,86.5 J1.10
GP1: G3.1 U5.10 | length 224.4
  Top Layer w7: U5.10 240.18,1080.63 260,1100.45 G3.1
GP2: G2.1 U5.9 | length 210.2
  Top Layer w7: G2.1 240,1180 240,1119 221.44,1100.45 183.52,1100.45 U5.9
GP3: G1.1 U5.8 | length 243.5
  Top Layer w7: G1.1 158.49,1180 212.2,1180 225.3,1166.91 225.3,1124.1 221.2,1120 U5.8
GP4: J1.9 U5.7 | length 1463.7
  Top Layer w10: 110,1140 110.12,1139.88 110.31,1139.68 U5.7
  Top Layer w15: 110.12,1139.88 80,1109.77 80,120 135.5,64.5 364.7,64.5 400,99.8 J1.9
GP5: J1.8 U5.6 | length 1612.4
  Top Layer w10: 98.49,1159.37 182.76,1160 U5.6
  Top Layer w15: 98.49,1159.37 50,1110.88 50,100 107.5,42.5 392.7,42.5 450,99.8 J1.8
GPS_CS: TP2.1 U1.18 U2.18 | length 1254.7
  Top Layer w10: U1.18 1198.74,358.74 1260,420 v1(1260,594.14) TP2.1
  Bottom Layer w10: v1(1260,594.14) 1284.14,570 1779.25,570 1809.25,540 U2.18
MISO: TP4.1 U1.12 U2.20 | length 880.6
  Top Layer w10: TP4.1 1110,552 v1(1135,527) 1135.37,526.63 1135.37,447.7 U1.12
  Bottom Layer w10: v1(1135,527) 1688.35,527 1723.23,492.13 U2.20@1723.23,427.56
MOSI: TP5.1 U1.13 U2.21 | length 936.4
  Top Layer w10: TP5.1 1041.26,564.69 1104.63,501.33 1104.63,447.7 U1.13
  Bottom Layer w10: v1(1105,497.7) 1257.7,497.7 1270,510 1400,510 1410,500 1410,480 1420,470 1440,470 1450,480 1450,500 1460,510 1660,510 1679.92,490.08 U2.21@1679.92,427.56
NetC9_2: C9.2 C34.2 D1.1 Q1.2 U4.1 U4.3 | length 251.1
  Top Layer w10: D1.1 300.98,325 325,325 330,320 C9.2@340,320 ; Q1.2@345,365 Q1.2@348.15,368.15 ; C9.2 348.15,319.9 348.15,349.88 Q1.2 348.15,371.38 348.15,392.83 355,399.69 U4.1
  Top Layer w20: U4.3@392.7,357.09 392,356.39 392,321.99 411,302.99 C34.2 C34.2@406,305
NetC14_2: C14.2 Q3.1 R7.2 | length 141.3
  Bottom Layer w15: Q3.1 C14.2 R7.2
NetC16_2: C16.2 C24.1 L4.2 R8.2 | length 158.5
  Top Layer w15: R8.2 766.71,1100 779,1112.29 L4.2 C24.1 820.5,1139.5 820.5,1105 820,1105 C16.2
NetC18_2: C18.2 L1.2 L2.1 R10.2 | length 122
  Top Layer w15: L2.1 L1.2 C18.2 R10.2
NetC23_1: C23.1 J4.1 L4.1 | length 372.7
  Top Layer w7.07: C23.1 700,1140.5 720,1160.5 ; L4.1 740.5,1140 720,1160.5 ; J4.1 980,1192.23 972.23,1200 740,1200 720,1180 720,1160.5
NetC27_2: C27.2 Q4.1 R13.2 | length 119.3
  Top Layer w15: Q4.1 1370.17,1020.8 1487.25,1020.8 R13.2
NetC30_2: C30.2 Q5.1 R16.1 | length 144
  Bottom Layer w10: R16.1 C30.2 804.09,130 820,114.09 Q5.1
NetD2_1: D2.1 R17.1 | length 65.2
  Top Layer w10: R17.1 D2.1
NetJ2_1: J2.1 U2.11 | length 140
  Bottom Layer w7.07: U2.11@2057.87,900 J2.1
NetQ2_2: Q2.2 R4.2 TP9.1 U1.30 | length 900.9
  Top Layer w10: R4.2 Q2.2 639.73,308.3 663.88,308.3 680,292.18 ; v1(680,240) 680,292.18 ; TP9.1 696.12,308.3 680,292.18 ; v1(1167.24,60) U1.30
  Bottom Layer w10: v1(680,240) 680,236.75 674.7,231.45 674.7,103.16 740.86,37 1144.24,37 v1(1167.24,60)
NetR2_1: R2.1 U3.2 | length 164.6
  Bottom Layer w15: U3.2 2035.35,340 2057.4,340 2080,317.4 R2.1
NetR2_2: R2.2 TP10.1 U1.29 | length 1108.5
  Top Layer w15: U1.29 1135.75,54.25 1170,20 1840,20 v1(1950,130) TP10.1
  Bottom Layer w15: v1(1950,130) 1950,145.43 2014.57,210 2043.41,210 R2.2
NetR5_1: R5.1 R7.1 U1.27 | length 988.7
  Top Layer w15: U1.27 1075.1,115.02 1075.1,155.1 1089.76,169.76 v1(1135.75,169.76)
  Bottom Layer w15: v1(1135.75,169.76) 1145.98,169.76 1241.5,74.24 1834.04,74.24 1835.26,73.02 1876.12,73.02 1893.4,90.3 1893.4,94.36 1900,100.96 R5.1 R7.1
NetR9_1: R9.1 X1.3 | length 82.6
  Top Layer w10: X1.3 357.06,1013 380.5,1036.44 403.44,1036.44 R9.1 ; X1.3@350,1010 X1.3@356,1010
NetR11_1: R11.1 R13.1 U1.26 | length 1326.2
  Top Layer w10: U1.26 1041.26,171.26 1071,201 1170,201 1179.81,191.19 1199.65,191.19 v1(1201.95,188.89) ; v1(1330,420) 1330,792.75 1488.05,950.8 R13.1
  Top Layer w15: R13.1 1489.8,985.65 1504.57,985.65 1513.36,994.44 1513.36,1091.21 1504.57,1100 1489.05,1100 R11.1 R11.1@1488.05,1097.44
  Bottom Layer w10: v1(1201.95,188.89) 1233.87,188.89 1330,285.02 v1(1330,420)
NetR14_1: R14.1 R16.2 U1.28 | length 594.8
  Top Layer w10: v1(1104.25,60) U1.28
  Bottom Layer w10: R16.2 R16.2@725.46,93.9 ; R14.1 722.79,188.89 700,188.89 691.7,180.59 691.7,110.2 708,93.9 R16.2@725.46,93.9 ; v1(1104.25,60) 1103.43,59.17 760.18,59.17 R16.2@725.46,93.9
NetR17_2: R17.2 U1.9 | length 306.4
  Top Layer w10: U1.9 R17.2
NetR18_2: R18.2 U1.31 | length 399.6
  Top Layer w10: U1.31 1198.74,66.26 1216.26,48.74 v3(1220,48.74) ; v3(1490,48.74) 1493.25,48.74 1504.5,60 R18.2
  Bottom Layer w10: v3(1220,48.74) v3(1490,48.74)
NetU1_6: U1.6 U7.3 | length 432.8
  Top Layer w10: v3(1215,327.24) U1.6
  Bottom Layer w10: U7.3 961.37,324.76 961.37,381.37 985,405 1137.24,405 v3(1215,327.24)
NetU1_7: U1.7 U7.4 | length 518.8
  Top Layer w10: v3(1240,358.74) U1.7
  Bottom Layer w10: U7.4 876.77,381.77 920,425 1173.74,425 v3(1240,358.74)
NetU1_25: U1.25 U8.3 | length 270.7
  Top Layer w10: U8.3 817.07,85.95 817.07,67.02 834.09,50 990.22,50 1009.76,69.54 U1.25
NRST: J1.4 R1.2 U1.4 | length 1328.6
  Top Layer w7: v1(1200,264.25) U1.4
  Bottom Layer w7: J1.4 440,190 620.69,190 659.2,151.49 659.2,96.74 735.94,20 1160,20 1188.74,48.74 1188.74,71.26 1110,150 1110,174.42 1154.92,219.34 1155.08,219.34 v1(1200,264.25) R1.2
OSCIN: C7.2 U1.2 Y1.2 | length 204.6
  Top Layer w15: U1.2 1343.21,201.26 1350,208.05 C7.2 1410,208.05 1434.51,183.54 Y1.2
OSCOUT: C8.2 U1.3 Y1.1 | length 237.1
  Top Layer w15: U1.3 1322.76,232.76 1350,260 1350,280 1368.05,298.05 C8.2 1447.17,298.05 1463.25,281.97 Y1.1
SCK: TP3.1 U1.11 U2.19 | length 916.6
  Top Layer w10: U1.11 v1(1167.24,550) 1167.24,553.25 1178.76,564.76 TP3.1
  Bottom Layer w10: v1(1167.24,550) 1731.3,550 1765.94,515.35 U2.19
SWCLK: J1.7 U1.24 | length 507.7
  Top Layer w7: J1.7 531.5,68.5 563.05,68.5 643.91,149.36 822.31,149.36 842.71,169.76 U1.24
SWDIO: J1.6 U1.23 | length 444.6
  Top Layer w7: J1.6 556.85,100 620.21,163.36 816.51,163.36 854.41,201.26 U1.23
TXM: C17.2 L1.1 TXM1.1 U5.3 | length 207.8
  Top Layer w7: C17.2@441,1059 441,1039 TXM1.1
  Top Layer w10: U5.3 420.96,1120 L1.1
  Top Layer w15: C17.2 L1.1
TXP: C22.2 L2.2 L3.2 TXP1.1 U5.4 | length 204.5
  Top Layer w10: U5.4 356.77,1139.84 440.84,1139.84 L2.2 ; TXP1.1 L3.2@440,1220
  Top Layer w15: L2.2 C22.2 L3.2
USART1_RX: J1.2 U1.20 | length 517.1
  Top Layer w7: J1.2 500,156.85 529.15,186 769.68,186 879.43,295.75 U1.20
USART1_TX: J1.3 U1.19 | length 576.1
  Top Layer w7: J1.3 500,200 763.88,200 891.13,327.24 U1.19
V_BATT: BT1.1 C33.2 Q1.3 U8.1 | length 1454
  Top Layer w20: BT1.1 605,650 775,480 v1(775,425) ; v1(636.5,86.5) 677.05,127.05 U8.1
  Top Layer w30: Q1.3 300,439.82 299.25,440.57 C33.2 185,485 350,650 BT1.1
  Power w20: v1(636.5,86.5) 775,225 v1(775,425)
V_GPS: C12.2 C13.2 Q3.3 R6.2 U2.23 | length 330.8
  Bottom Layer w30: U2.23@1593.31,427.56 C13.2 C12.2 R6.2 1632.56,160.75 1679.25,160.75 Q3.3
V_VHF: C19.2 C20.1 C21.2 C25.2 C26.2 Q4.3 R10.1 R12.2 U5.5 U6.3 | length 402.9
  Top Layer w10: v1(355,1265) 355,1236 C21.2 C20.1 354,1160.28 354.91,1159.37 U5.5 ; R10.1 R10.1@560,1141 ; U6.3@762,1007 U6.3 ; v4(1185,1039) 1220,1039 ; C26.2 1280,988 1291.95,976.05 R12.2
  Top Layer w15: R10.1 583.5,1140 590,1133.5 v1(590,1100) ; U6.3@765,1010 764,1009 764,961 C19.2 v1(820,960)
V_XBEE: C28.2 C29.2 Q5.3 R15.2 U7.2 | length 348
  Bottom Layer w20: Q5.3 941.97,151.49 981.12,112.34 1034.25,112.34 ; R15.2 1034.25,112.34 ; U7.2 1033.88,318.52 1033.88,212.68 C29.2 1033.5,143.44 C28.2 1034.25,112.34
VBUS: C35.2 D1.2 J1.5 Q1.1 Q2.1 R3.2 | length 556.3
  Top Layer w20: Q1.1 262.6,320.28 261.16,318.84 300,280 D1.2 300,260 340,220 473.94,220 560,306.06 Q2.1@560,310 ; J1.5 J1.5@351,151
  Bottom Layer w30: J1.5 349,151 C35.2 349,220 v3(400,220)
pads on no net: U1.8 U1.10 U1.14 U1.15 U1.21 U1.22 U2.1 U2.3 U2.4 U2.5 U2.6 U2.7 U2.8 U2.9 U2.14 U2.15 U2.16 U2.17 U4.5 U7.5 U7.6 U7.7 U7.8 U7.9 U7.10 U7.12 U7.14 U7.15 U7.16 U7.17 U7.18 U7.19 U7.20 U7.21 U7.23 U7.24 U7.25 U7.26 U7.27 U7.28 U7.29 U7.30 U7.31 U7.32 U7.33 U7.34 U7.36 U7.37 X1.2 X1.4
copper on no net: | length 31.1
  Bottom Layer w10: 85.04,555.12 107.06,577.14

## Polygon pours and split planes (outlines as drawn)
3V3 on Power "Power-3V3" (solid, pour order 2): 0,800 0,0 2200,0 2200,1300 1350,1300 1350,800
V_VHF on Power "Power-V_VHF" (solid, pour order 0): 0,1300 1350,1300 1350,800 0,800
GND on Top Layer "Top Layer-GND" (solid, pour order 16): 0,1299.21 0,0 2200,0 2200,1299.21
NetC9_2 on Top Layer "Top Layer-NetC9_2" (solid, remove dead copper, pour order 12): 349,343 361,343 372,354 392,354 392,366 372,366 360,378 349,378
V_VHF on Top Layer "Top Layer-V_VHF" (solid, pour order 4): 1280,1044 1250,1014 1250,974 1210,974 1210,1074 1250,1074 1280,1074
GND on Ground "Ground-GND" (solid, remove dead copper, pour order 14): 0,1300 2200,1300 2200,0 0,0
GND on Bottom Layer "Bottom Layer-GND" (solid, remove dead copper, pour order 18): 0,1300 0,0 2200,0 2200,1300

## Keep-outs
Bottom Layer:
  rectangle: 2000,930 2120,1050

## Silkscreen, mask and mechanical layers (free items; w line width, h text height)
Top Overlay:
  lines w10: 140,1110 140,1180 160,1200 290,1200 290,1240 ; 200,220 280,220 300,240 ; 400,200 400,220 500,220 500,200 ; 450,970 450,1040 ; 490,1150 500,1160 ; 490,1190 490,1200 500,1210 ; 490,1230 500,1240 500,1250 ; 510,990 540,990 550,980 ; 520,1040 520,1080
Bottom Overlay:
  lines w10: 1700,260 1740,260 1790,310 1810,310 ; 1740,360 1750,370 1760,370 1790,370 1810,350
Mechanical 1:
  lines w47.24: 0,0 0,1299.21 ; 0,0 2200,0 ; 0,0 0,1299.21 ; 0,0 2200,0 ; 0,1299.21 2200,1299.21 ; 0,1299.21 2200,1299.21 ; 2200,0 2200,1299.21 ; 2200,0 2200,1299.21